# EAGLE board ECE445 (EAGLE 9.5.2)
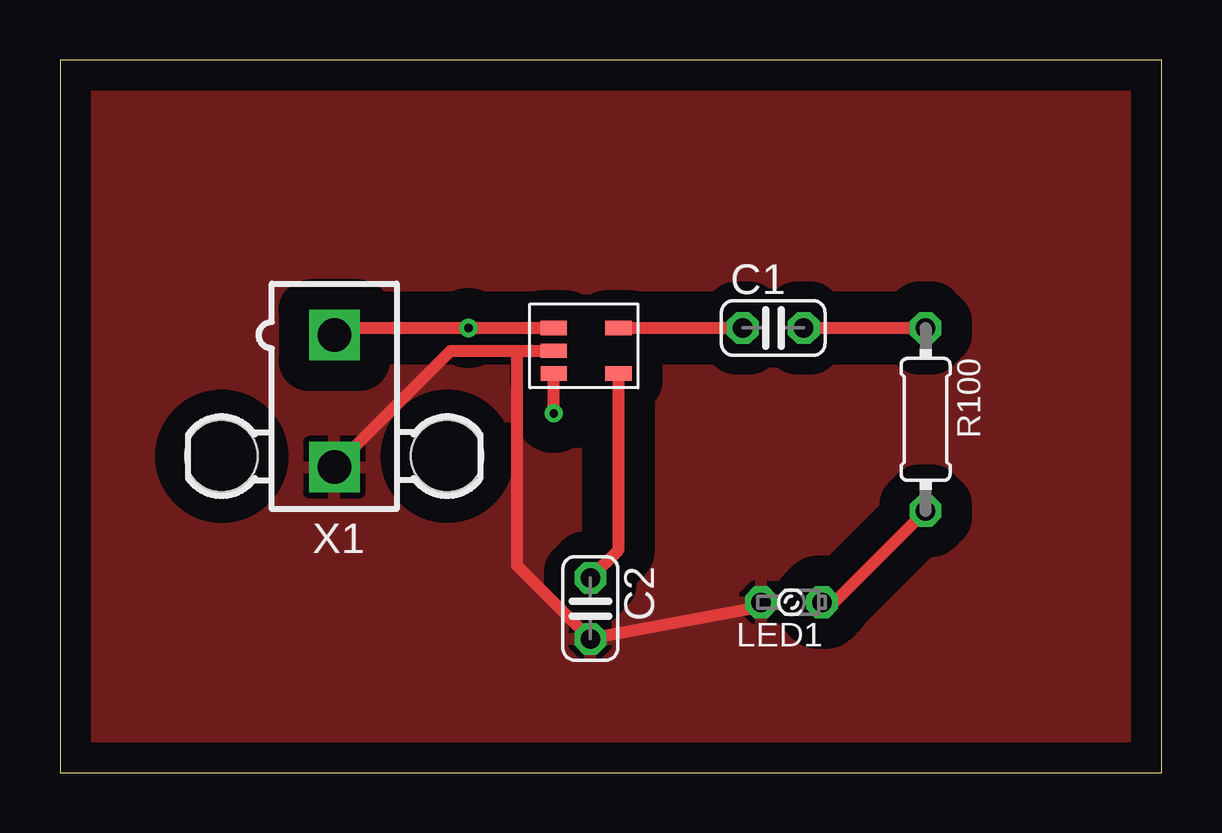
[diagram p0: board, top side]
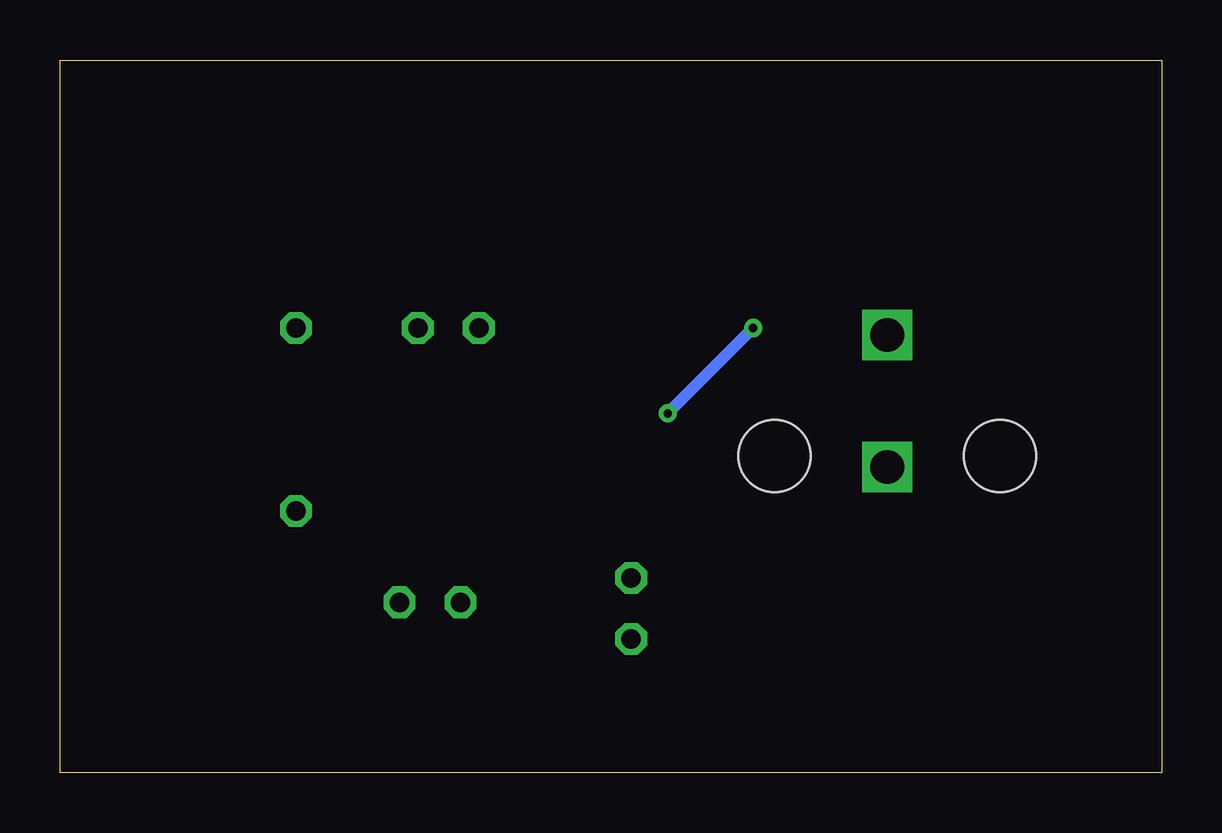
[diagram p1: board, bottom side, seen from below]

Size 45.9 x 29.71 mm. Coordinates in mm from the lower left corner, seen from the top.
Outline: 0,0 45.9,0 45.9,29.71 0,29.71 0,0
Copper layers (1*16): Top 0.035mm / dielectric 1.5mm / Bottom 0.035mm
Design rules "default": minimum track width 6mil, minimum drill 0.35mm, track to track 6mil, track to pad 6mil, pad to pad 6mil, via to via 6mil, smd to smd 6mil, copper to edge 40mil, drill to drill 6mil, minimum pad ring 10mil, minimum via ring 8mil, stop-mask expansion 4mil, vias tented up to drill 0mil, thermal gap 10mil

## Footprints (pad centres in the part's own frame; a part is rotated, then mirrored left to right if it is on the bottom)
C025-024X044 = drill 0.813 octagon: 1 -1.27,0; 2 1.27,0
LSU260 = drill 0.813 octagon: A -1.27,0; K 1.27,0
0204/7 = drill 0.813 octagon: 1 -3.81,0; 2 3.81,0
TPS799 = smd 1.1 x 0.6: EN 0,-1.9; GND 0,-0.95; IN 0,0; NR 2.7,-1.9; VOUT 2.7,0
5566-2 = drill 1.4 square: 1 0,-2.75; 2 0,2.75 | hole 3: 4.7,2.29; -4.7,2.29

## Placement (x,y rotation side)
C1  2.2uF  [C025-024X044]  29.72,18.54 0 top
C2  [C025-024X044]  22.1,6.86 270 top
LED1  [LSU260]  30.48,7.11 180 top
R100  [0204/7]  36.07,14.73 270 top
U$1  TPS799  [TPS799]  20.57,18.54 0 top
X1  5566-2  [5566-2]  11.43,15.49 180 top

## Library data of the parts
C1 C2 = rcl; SPICEPREFIX: C
LED1 = led
R100 = rcl; SPICEPREFIX: R
U$1 = library1
X1 = con-molex; MF: MOLEX; OC_FARNELL: 1822072; OC_NEWARK: unknown

## Nets
5V_IN: U$1.EN U$1.IN X1.1
GND: C2.2 LED1.K U$1.GND X1.2
N$1: C1.2 R100.1
N$2: C2.1 U$1.NR
N$3: C1.1 U$1.VOUT
N$4: LED1.A R100.2

## Tracks (layer width: path | path; a pad name or v marks a point on that pad's centre or on a via)
5V_IN  (via drill 0.35)
  Top 0.508: X1.1 11.73,18.54 v17.02,18.54 U$1.IN | v20.57,14.99 U$1.EN
  Bottom 0.508: v17.02,18.54 v20.57,14.99
GND
  Top 0.508: LED1.K 28.96,6.86 C2.2 19.05,8.64 19.05,17.59 | X1.2 16.28,17.59 19.05,17.59 | 19.05,17.59 U$1.GND
  pour Top (isolate 1.27): 0,0 45.97,0 45.97,29.46 0,29.46
N$1
  Top 0.508: C1.2 R100.1
N$2
  Top 0.508: C2.1 23.27,9.3 U$1.NR
N$3
  Top 0.508: U$1.VOUT C1.1
N$4
  Top 0.508: R100.2 32.26,7.11 LED1.A